# EAGLE board jlpcb-096 (EAGLE 5.09)
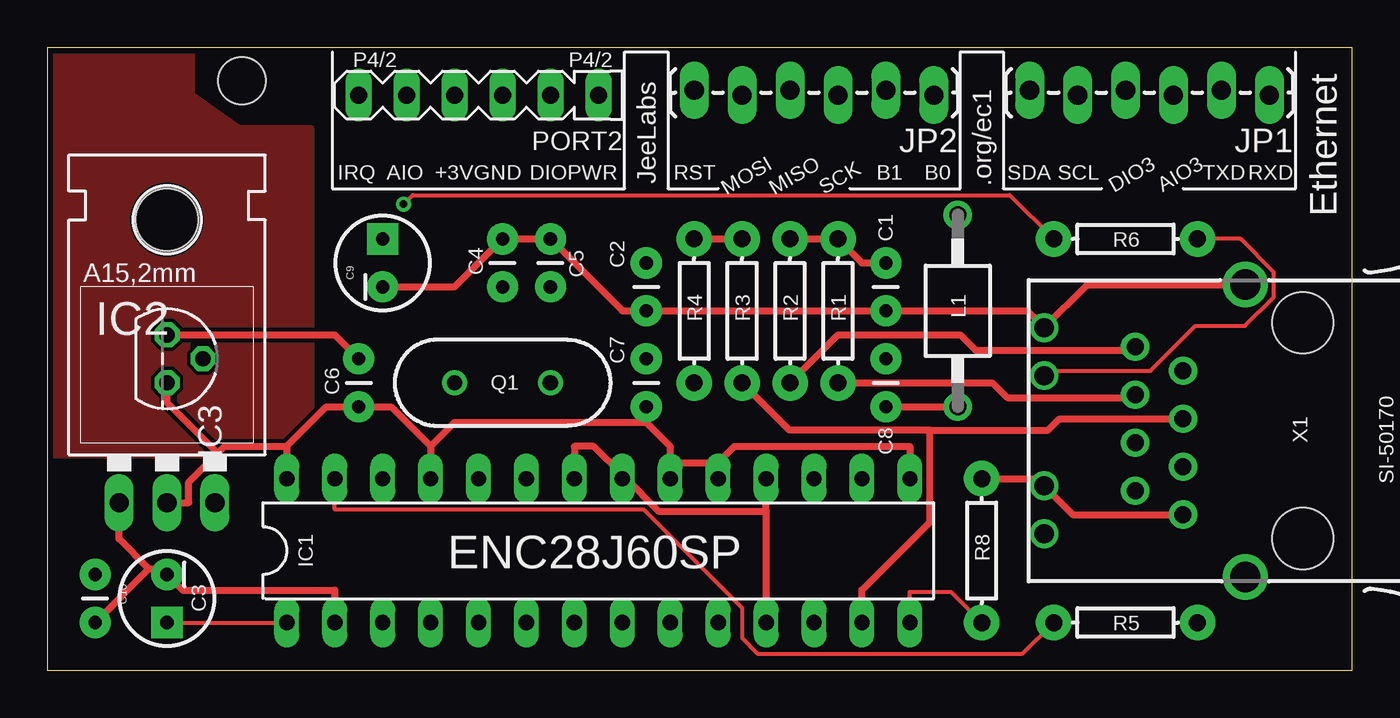
[diagram p0: board, top side]
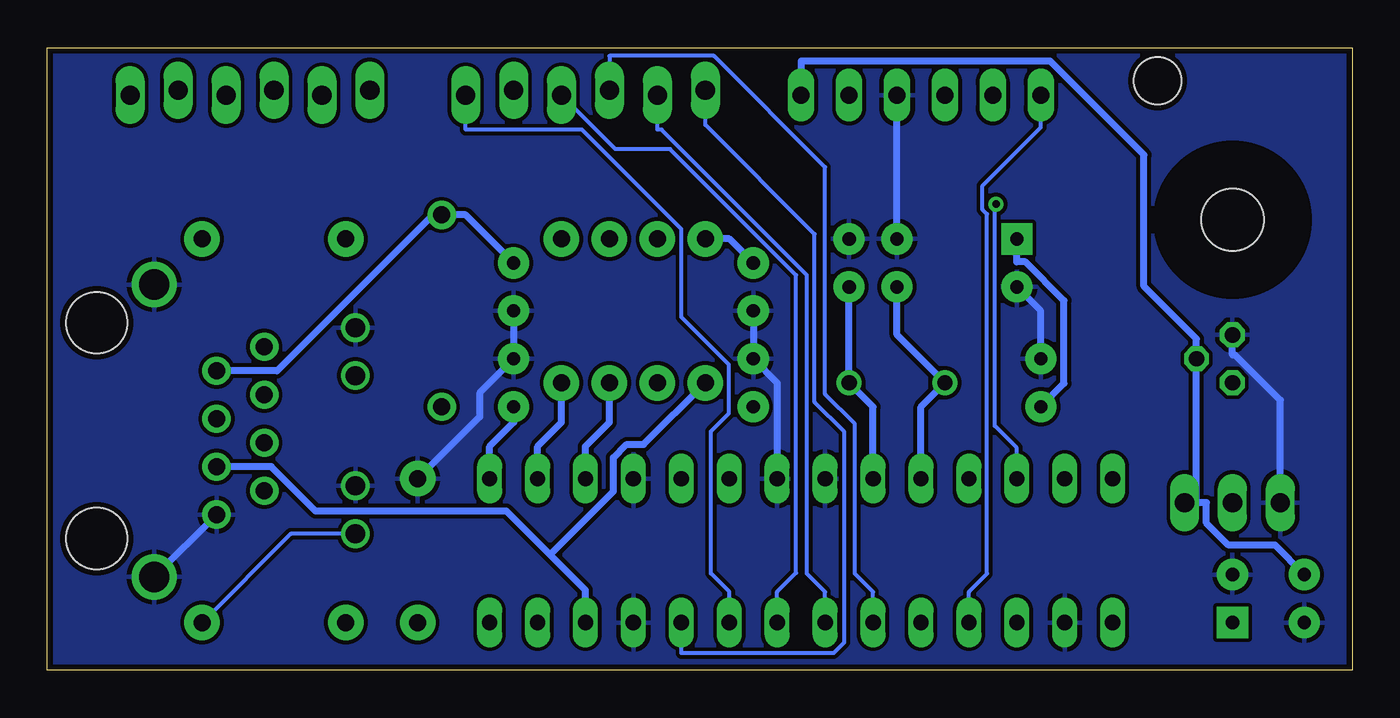
[diagram p1: board, bottom side, seen from below]

Size 69.17 x 33 mm. Coordinates in mm from the lower left corner, seen from the top.
Outline: 0,0 69.17,0 69.17,33 0,33 0,0
Copper layers (1*16): Top 0.035mm / dielectric 1.5mm / Bottom 0.035mm
Design rules "default *": minimum track width 8mil, minimum drill 0.4mm, track to track 8mil, track to pad 8mil, pad to pad 8mil, via to via 8mil, smd to smd 8mil, copper to edge 12mil, drill to drill 8mil, minimum pad ring 10mil, minimum via ring 8mil, stop-mask expansion 4mil, vias tented up to drill 20mil, thermal gap 10mil
Net classes: 0 default: width 0.203 mm; 1 power: width 0.381 mm
Holes 2.5 mm at 10.32,31.24

## Footprints (pad centres in the part's own frame; a part is rotated, then mirrored left to right if it is on the bottom)
CAP-PTH-SMALL = drill 0.7 pad 1.651 round: 1 0,0; 2 2.54,0
CPOL-RADIAL-10UF-25V = drill 0.7 pad 1.651 square: 1 1.27,0 | drill 0.7 pad 1.651 round: 2 -1.27,0
DIL28-3 = drill 0.813 long: 1 -16.51,-3.81; 2 -13.97,-3.81; 3 -11.43,-3.81; 4 -8.89,-3.81; 5 -6.35,-3.81; 6 -3.81,-3.81; 7 -1.27,-3.81; 8 1.27,-3.81; 9 3.81,-3.81; 10 6.35,-3.81; 11 8.89,-3.81; 12 11.43,-3.81; 13 13.97,-3.81; 14 16.51,-3.81; 15 16.51,3.81; 16 13.97,3.81; 17 11.43,3.81; 18 8.89,3.81; 19 6.35,3.81; 20 3.81,3.81; 21 1.27,3.81; 22 -1.27,3.81; 23 -3.81,3.81; 24 -6.35,3.81; 25 -8.89,3.81; 26 -11.43,3.81; 27 -13.97,3.81; 28 -16.51,3.81
TO220L1 = drill 1.016 long: 1 -2.54,-3.81; 2 0,-3.81; 3 2.54,-3.81 | hole 3.302: 0,11.176
TO92 = drill 0.813 octagon: 1 -1.27,0; 2 0,1.905; 3 1.27,0
1X06_LOCK_LONGPADS = drill 1.016 long: 1 0,0; 2 2.54,-0.254; 3 5.08,0; 4 7.62,-0.254; 5 10.16,0; 6 12.7,-0.254
BL01RN1A = drill 0.9 pad 1.5 round: 1 -5.08,0; 2 5.08,0
PORT6PIN = drill 0.9 long: 1 -6.35,0; 2 -3.81,0; 3 -1.27,0; 4 1.27,0; 5 3.81,0; 6 6.35,0
HC49US = drill 0.813 round: 1 -2.54,0; 2 2.54,0
AXIAL-0.3 = drill 0.9 pad 1.88 round: P$1 -3.81,0; P$2 3.81,0
SI-50170 = drill 0.9 pad 1.5 round: 1 4.445,5.842; 2 3.175,3.302; 3 1.905,5.842; 4 0.635,3.302; 5 -0.635,5.842; 6 -1.905,3.302; 7 -3.175,5.842; 8 -4.445,3.302 | drill 1.016 pad 1.5 round: A1 -5.461,10.668; A2 2.921,10.668; C1 -2.921,10.668; C2 5.461,10.668 | drill 1.6 pad 2.2 round: S1 -7.747,0; S2 7.747,0 | hole 3.251: -5.715,-3.048; 5.715,-3.048

## Placement (x,y rotation side)
C1  .1µ  [CAP-PTH-SMALL]  44.45,19.05 90 top
C2  .1µ  [CAP-PTH-SMALL]  31.75,19.05 90 top
C3  10µ  [CPOL-RADIAL-10UF-25V]  6.35,3.81 270 top
C4  20p  [CAP-PTH-SMALL]  24.13,20.32 90 top
C5  20p  [CAP-PTH-SMALL]  26.67,20.32 90 top
C6  .1µ  [CAP-PTH-SMALL]  16.51,13.97 90 top
C7  .1µ  [CAP-PTH-SMALL]  31.75,13.97 90 top
C8  .1µ  [CAP-PTH-SMALL]  44.45,13.97 90 top
C9  10µ  [CPOL-RADIAL-10UF-25V]  17.78,21.59 90 top
C10  .1µ  [CAP-PTH-SMALL]  2.54,5.08 270 top
IC1  ENC28J60SP  [DIL28-3]  29.21,6.35 0 top
IC2  LD117AV33  [TO220L1]  6.35,12.7 0 top
IC3  MCP1702Z  [TO92]  6.35,16.51 270 top
JP1  [1X06_LOCK_LONGPADS]  64.77,30.48 180 top
JP2  [1X06_LOCK_LONGPADS]  46.99,30.48 180 top
L1  BL01RN1A  [BL01RN1A]  48.26,19.05 270 top
PORT2  JEEPORT-LONGPADS  [PORT6PIN]  22.86,30.48 180 top
Q1  [HC49US]  24.13,15.24 0 top
R1  49.9  [AXIAL-0.3]  41.91,19.05 90 top
R2  49.9  [AXIAL-0.3]  39.37,19.05 270 top
R3  49.9  [AXIAL-0.3]  36.83,19.05 270 top
R4  49.9  [AXIAL-0.3]  34.29,19.05 90 top
R5  270  [AXIAL-0.3]  57.15,2.54 180 top
R6  270  [AXIAL-0.3]  57.15,22.86 180 top
R8  2.32k  [AXIAL-0.3]  49.53,6.35 270 top
X1  SI-50170  [SI-50170]  63.5,12.7 90 top

## Library data of the parts
C1-C10 JP1 JP2 Q1 R1-R6 R8 = SparkFun
IC1 = microchip
IC2 = v-reg
IC3 PORT2 = JeeLabs
L1 = inductors
X1 = con-stewart

## Nets
AIO3: JP1.3
B0: IC1.9 JP2.1
B1: JP2.2
DIO3: JP1.4
GND [power]: C1.1 C2.1 C3.2 C4.2 C5.2 C6.2 C7.2 C8.2 C9.2 C10.2 IC1.2 IC1.11 IC1.18 IC1.21 IC1.22 IC2.1 IC3.1 PORT2.3 R8.P$1 X1.8 X1.C1 X1.C2 X1.S1 X1.S2
MISO: IC1.6 JP2.4
MOSI: IC1.7 JP2.5
N$2: C3.1 IC1.1
N$3: IC1.14 R8.P$2
N$4 [power]: C4.1 IC1.24 Q1.1
N$5 [power]: C5.1 IC1.23 Q1.2
N$8 [power]: C2.2 R3.P$1 R4.P$2
N$13: IC1.4 PORT2.6
N$14: PORT2.2
N$15 [power]: C1.2 L1.1 R1.P$2 R2.P$1 X1.2
N$17 [power]: IC1.17 R2.P$2 X1.1
N$18: PORT2.5
N$19 [power]: IC1.16 R1.P$1 X1.3
N$20 [power]: IC1.13 R3.P$2 X1.4
N$21 [power]: IC1.12 R4.P$1 X1.6
N$23: R5.P$1 X1.A1
N$24: R6.P$1 X1.A2
N$26: IC1.26 R6.P$2
N$27: IC1.27 R5.P$2
PWR [power]: C10.1 IC2.3 IC3.2 PORT2.1
RST: IC1.10 JP2.6
RXD: JP1.1
SCK: IC1.8 JP2.3
SCL: JP1.5
SDA: JP1.6
TXD: JP1.2
VCC [power]: PORT2.4
VDD [power]: C6.1 C7.1 C8.1 C9.1 IC1.15 IC1.19 IC1.20 IC1.25 IC1.28 IC2.2 IC3.3 L1.2

## Tracks (layer width: path | path; a pad name or v marks a point on that pad's centre or on a via)
B0
  Bottom 0.203: IC1.9 33.02,4.17 33.99,5.14 33.99,12.67 33.04,13.62 33.04,16.2 35.56,18.72 35.56,23.39 40.83,28.65 46.99,28.65 JP2.1
GND
  Top 0.381: 38.1,8.45 IC1.11 | 38.1,8.45 38.1,9.3 IC1.18 | 30.48,10.26 30.59,10.26 32.41,8.45 38.1,8.45 | 30.48,10.26 30.48,10.36 28.97,11.88 27.94,11.88 IC1.22 | IC1.21 30.48,10.26 | R8.P$1 52.45,10.16 X1.C1 54.36,8.26 X1.8 | C6.2 15.24,17.78 IC3.1 | C10.2 5.39,5.39 | 5.39,5.39 6.04,5.39 C3.2 7.17,4.25 15.24,4.25 IC1.2 | 5.39,5.39 3.81,6.97 IC2.1 | X1.S2 55.12,20.45 X1.C2 51.94,19.05 C1.1 C2.1 30.48,19.05 C5.2 C4.2 21.59,20.32 C9.2
  Bottom 0.381: IC1.21 30.48,15.24 C7.2 C2.1 | R8.P$1 46.25,13.44 46.25,14.71 C8.2 C1.1 | X1.8 X1.S1 | C9.2 16.51,19.05 C6.2 | IC2.1 3.81,14.32 6.22,16.73 6.35,16.73 IC3.1 | C4.2 PORT2.3
  pour Bottom: 0,33 69.2,33 69.2,0 0,0
MISO
  Bottom 0.203: IC1.6 25.4,4.17 26.36,5.13 26.36,13.06 27.94,14.63 27.94,26.66 33.84,32.56 39.37,32.56 JP2.4
MOSI
  Bottom 0.203: IC1.7 27.94,4.17 28.91,5.13 28.91,20.95 36.61,28.65 36.83,28.65 JP2.5
N$1
  pour Top: 11.43,11.43 0.38,11.43 0.38,32.64 7.62,32.64 7.62,30.48 10.16,28.7 13.97,28.7 13.97,13.97
N$2
  Top 0.203: C3.1 IC1.1
N$3
  Top 0.203: IC1.14 45.72,4.17 47.9,4.17 R8.P$2
N$4
  Bottom 0.381: C4.1 24.13,17.78 Q1.1 22.86,13.97 IC1.24
N$5
  Bottom 0.381: IC1.23 25.4,13.97 Q1.2 C5.1
N$8
  Top 0.381: R4.P$2 R3.P$1
  Bottom 0.381: R4.P$2 33.02,22.86 C2.2
N$13
  Bottom 0.203: IC1.4 20.32,4.17 19.36,5.13 19.36,24.17 19.6,24.41 19.6,25.68 16.51,28.77 PORT2.6
N$15
  Top 0.381: C1.2 43.18,21.59 R1.P$2 R2.P$1
  Bottom 0.381: C1.2 46.99,24.13 L1.1 48.73,24.13 56.98,15.88 X1.2
N$17
  Top 0.381: X1.1 57.47,16.96 49.22,16.96 48.4,17.78 41.91,17.78 R2.P$2
  Bottom 0.381: IC1.17 40.64,11.88 39.37,13.14 R2.P$2
N$19
  Top 0.381: X1.3 57.5,14.45 50.88,14.45 50.09,15.24 R1.P$1
  Bottom 0.381: IC1.16 43.18,11.88 41.91,13.14 R1.P$1
N$20
  Top 0.381: 46.78,12.73 39.34,12.73 R3.P$2 | X1.4 53.64,13.34 53.04,12.73 46.78,12.73 | 46.78,12.73 46.78,7.86 43.18,4.25 IC1.13
N$21
  Bottom 0.381: 42.52,6.13 40.64,4.25 IC1.12 | X1.6 57.3,10.79 54.95,8.45 44.83,8.45 42.52,6.13 | R4.P$1 37.56,11.97 38.46,11.97 39.16,11.27 39.16,9.48 42.52,6.13
N$23
  Bottom 0.203: X1.A1 56.26,7.24 R5.P$1
N$24
  Top 0.203: R6.P$1 63.25,22.86 65,21.1 65,19.79 63.47,18.25 60.85,18.25 58.47,15.88 53.09,15.88 X1.A2
N$26  (via drill 0.4 pad 0.81)
  Top 0.203: R6.P$2 51.01,25.19 19.37,25.19 v18.89,24.7
  Bottom 0.203: IC1.26 17.78,11.79 18.95,12.95 18.95,24.64 v18.89,24.7
N$27
  Top 0.203: IC1.27 15.24,8.53 31.62,8.53 36.83,3.32 36.83,1.72 37.66,0.89 51.69,0.89 R5.P$2
PWR
  Bottom 0.381: PORT2.1 29.21,32.28 16.01,32.28 11.04,27.31 11.04,20.34 8.26,17.56 IC3.2 8.26,8.89 | 8.26,8.89 7.73,8.89 7.73,7.81 6.56,6.64 4.1,6.64 C10.1 | 8.26,8.89 IC2.3
RST
  Bottom 0.203: IC1.10 35.56,0.91 27.5,0.91 26.92,1.49 26.92,12.64 28.5,14.21 28.5,23.11 34.29,28.91 JP2.6
SCK
  Bottom 0.203: IC1.8 30.48,4.17 29.48,5.17 29.48,20.95 36.15,27.62 39.05,27.62 JP2.3
VDD
  Top 0.381: 20.32,11.88 18.23,13.97 C6.1 14.79,13.97 12.7,11.88 | 31.75,13.14 33.02,11.88 33.02,11.02 | 31.75,13.14 C7.1 | 31.75,13.14 21.59,13.14 20.32,11.88 | 20.32,11.88 IC1.25 | 9.03,11.5 9.41,11.88 12.7,11.88 | IC1.15 45.72,11.88 36.42,11.88 35.56,11.02 | 35.56,11.02 IC1.19 | 33.02,11.02 IC1.20 | 33.02,11.02 35.56,11.02 | 9.03,11.5 7.51,9.97 7.51,8.89 IC2.2 | 9.03,11.5 6.35,14.19 IC3.3 | 12.7,11.88 IC1.28 | C8.1 L1.2
  Bottom 0.381: C9.1 17.78,21.64 17.32,21.64 15.28,19.59 15.28,15.2 C6.1 | IC1.15 45.72,11.88 44.45,13.14 C8.1

## Text on the board
_tsilk: P4/2 | P4/2 | Ethernet | IRQ | AIO | +3V | GND | DIO | PWR | RST | MOSI | MISO | SCK | B1 | B0 | SDA | SCL | DIO3 | AIO3 | TXD | RXD | JeeLabs | .org/ec1